# EAGLE board CT_schematic (EAGLE 7.6.0)

Size 100 x 80 mm. Coordinates in mm from the lower left corner, seen from the top.
Outline: 0,0 100,0 100,80 0,80 0,0
Copper layers (1*16): Top 0.035mm / dielectric 1.5mm / Bottom 0.035mm
Design rules "default": minimum track width 10mil, minimum drill 24mil, track to track 8mil, track to pad 8mil, pad to pad 8mil, via to via 8mil, smd to smd 8mil, copper to edge 40mil, drill to drill 8mil, minimum pad ring 10mil, minimum via ring 8mil, stop-mask expansion 4mil, vias tented up to drill 0mil, thermal gap 10mil

## Footprints (pad centres in the part's own frame; a part is rotated, then mirrored left to right if it is on the bottom)
C0603 = smd 0.8 x 0.8: 1 -0.762,0; 2 0.762,0
C0402 = smd 0.5 x 0.5: 1 -0.508,0; 2 0.508,0
C0805 = smd 1.2 x 1.3: 1 -1.016,0; 2 1.016,0
C1210 = smd 1.2 x 2.5: 1 -1.524,0; 2 1.524,0
R0603 = smd 0.8 x 0.8: 1 -0.762,0; 2 0.762,0
EXV-9H = smd 3.505 x 1.676: 1 -2.857,0; 2 2.857,0
L0603 = smd 0.8 x 0.8: 1 -0.762,0; 2 0.762,0
IND_PM3316 = smd 2.921 x 2.794: 1 -5.144,0; 2 5.144,0
IND25X25CZ = smd 2.489 x 3.429: 1 -2.718,0; 2 2.718,0
PJ-037B_PACKAGE = drill 3.7 square: 1 12,0 | drill 3.2 square: 2 6,0
UFBGA176_25 = smd 0.3 x 0.3: A1 -4.55,4.55; A2 -3.9,4.55; A3 -3.25,4.55; A4 -2.6,4.55; A5 -1.95,4.55; A6 -1.3,4.55; A7 -0.65,4.55; A8 0,4.55; A9 0.65,4.55; A10 1.3,4.55; A11 1.95,4.55; A12 2.6,4.55; A13 3.25,4.55; A14 3.9,4.55; A15 4.55,4.55; B1 -4.55,3.9; B2 -3.9,3.9; B3 -3.25,3.9; B4 -2.6,3.9; B5 -1.95,3.9; B6 -1.3,3.9; B7 -0.65,3.9; B8 0,3.9; B9 0.65,3.9; B10 1.3,3.9; B11 1.95,3.9; B12 2.6,3.9; B13 3.25,3.9; B14 3.9,3.9; B15 4.55,3.9; C1 -4.55,3.25; C2 -3.9,3.25; C3 -3.25,3.25; C4 -2.6,3.25; C5 -1.95,3.25; C6 -1.3,3.25; C7 -0.65,3.25; C8 0,3.25; C9 0.65,3.25; C10 1.3,3.25; C11 1.95,3.25; C12 2.6,3.25; C13 3.25,3.25; C14 3.9,3.25; C15 4.55,3.25; D1 -4.55,2.6; D2 -3.9,2.6; D3 -3.25,2.6; D4 -2.6,2.6; D5 -1.95,2.6; D6 -1.3,2.6; D7 -0.65,2.6; D8 0,2.6; D9 0.65,2.6; D10 1.3,2.6; D11 1.95,2.6; D12 2.6,2.6; D13 3.25,2.6; D14 3.9,2.6; D15 4.55,2.6; E1 -4.55,1.95; E2 -3.9,1.95; E3 -3.25,1.95; E4 -2.6,1.95; E12 2.6,1.95; E13 3.25,1.95; E14 3.9,1.95; E15 4.55,1.95; F1 -4.55,1.3; F2 -3.9,1.3; F3 -3.25,1.3; F4 -2.6,1.3; F6 -1.3,1.3; F7 -0.65,1.3; F8 0,1.3; F9 0.65,1.3; F10 1.3,1.3; F12 2.6,1.3; F13 3.25,1.3; F14 3.9,1.3; F15 4.55,1.3; G1 -4.55,0.65; G2 -3.9,0.65; G3 -3.25,0.65; G4 -2.6,0.65; G6 -1.3,0.65; G7 -0.65,0.65; G8 0,0.65; G9 0.65,0.65; G10 1.3,0.65; G12 2.6,0.65; G13 3.25,0.65; G14 3.9,0.65; G15 4.55,0.65; H1 -4.55,0; H2 -3.9,0; H3 -3.25,0; H4 -2.6,0; H6 -1.3,0; H7 -0.65,0; H8 0,0; H9 0.65,0; H10 1.3,0; H12 2.6,0; H13 3.25,0; H14 3.9,0; H15 4.55,0; J1 -4.55,-0.65; J2 -3.9,-0.65; J3 -3.25,-0.65; J4 -2.6,-0.65; J6 -1.3,-0.65; J7 -0.65,-0.65; J8 0,-0.65; J9 0.65,-0.65; J10 1.3,-0.65; J12 2.6,-0.65; J13 3.25,-0.65; J14 3.9,-0.65; J15 4.55,-0.65; K1 -4.55,-1.3; K2 -3.9,-1.3; K3 -3.25,-1.3; K4 -2.6,-1.3; K6 -1.3,-1.3; K7 -0.65,-1.3; K8 0,-1.3; K9 0.65,-1.3; K10 1.3,-1.3; K12 2.6,-1.3; K13 3.25,-1.3; K14 3.9,-1.3; K15 4.55,-1.3; L1 -4.55,-1.95; L2 -3.9,-1.95; L3 -3.25,-1.95; L4 -2.6,-1.95; L12 2.6,-1.95; L13 3.25,-1.95; L14 3.9,-1.95; L15 4.55,-1.95; M1 -4.55,-2.6; M2 -3.9,-2.6; M3 -3.25,-2.6; M4 -2.6,-2.6; M5 -1.95,-2.6; M6 -1.3,-2.6; M7 -0.65,-2.6; M8 0,-2.6; M9 0.65,-2.6; M10 1.3,-2.6; M11 1.95,-2.6; M12 2.6,-2.6; M13 3.25,-2.6; M14 3.9,-2.6; M15 4.55,-2.6; N1 -4.55,-3.25; N2 -3.9,-3.25; N3 -3.25,-3.25; N4 -2.6,-3.25; N5 -1.95,-3.25; N6 -1.3,-3.25; N7 -0.65,-3.25; N8 0,-3.25; N9 0.65,-3.25; N10 1.3,-3.25; N11 1.95,-3.25; N12 2.6,-3.25; N13 3.25,-3.25; N14 3.9,-3.25; N15 4.55,-3.25; P1 -4.55,-3.9; P2 -3.9,-3.9; P3 -3.25,-3.9; P4 -2.6,-3.9; P5 -1.95,-3.9; P6 -1.3,-3.9; P7 -0.65,-3.9; P8 0,-3.9; P9 0.65,-3.9; P10 1.3,-3.9; P11 1.95,-3.9; P12 2.6,-3.9; P13 3.25,-3.9; P14 3.9,-3.9; P15 4.55,-3.9; R1 -4.55,-4.55; R2 -3.9,-4.55; R3 -3.25,-4.55; R4 -2.6,-4.55; R5 -1.95,-4.55; R6 -1.3,-4.55; R7 -0.65,-4.55; R8 0,-4.55; R9 0.65,-4.55; R10 1.3,-4.55; R11 1.95,-4.55; R12 2.6,-4.55; R13 3.25,-4.55; R14 3.9,-4.55; R15 4.55,-4.55
SOT-23-6 = smd 1.1 x 0.6: 1 -1.4,0.95; 2 -1.4,0; 3 -1.4,-0.95; 4 1.4,-0.95; 5 1.4,0; 6 1.4,0.95
SSOP-28 = smd 1.5 x 0.4: 1 -3.625,4.225; 2 -3.625,3.575; 3 -3.625,2.925; 4 -3.625,2.275; 5 -3.625,1.625; 6 -3.625,0.975; 7 -3.625,0.325; 8 -3.625,-0.325; 9 -3.625,-0.975; 10 -3.625,-1.625; 11 -3.625,-2.275; 12 -3.625,-2.925; 13 -3.625,-3.575; 14 -3.625,-4.225; 15 3.625,-4.225; 16 3.625,-3.575; 17 3.625,-2.925; 18 3.625,-2.275; 19 3.625,-1.625; 20 3.625,-0.975; 21 3.625,-0.325; 22 3.625,0.325; 23 3.625,0.975; 24 3.625,1.625; 25 3.625,2.275; 26 3.625,2.925; 27 3.625,3.575; 28 3.625,4.225
FCI_10118193-0001LF = smd 0.4 x 1.35: 1 -1.3,2.675; 2 -0.65,2.675; 3 0,2.675; 4 0.65,2.675; 5 1.3,2.675 | smd 1.6 x 1.4: 6 -3.2,2.45; 7 3.2,2.45 | smd 1.9 x 1.9: 8 -1.2,0; 9 1.2,0 | hole 0.5: -3.3,0; 3.3,0
S29VS256RABBHW000 = smd 0.3 x 0.3: A1 -6,3; A14 0.5,3; C3 -5,2; C4 -4.5,2; C5 -4,2; C6 -3.5,2; C7 -3,2; C8 -2.5,2; C9 -2,2; C10 -1.5,2; C11 -1,2; C12 -0.5,2; D3 -5,1.5; D4 -4.5,1.5; D5 -4,1.5; D6 -3.5,1.5; D7 -3,1.5; D8 -2.5,1.5; D9 -2,1.5; D10 -1.5,1.5; D11 -1,1.5; D12 -0.5,1.5; E3 -5,1; E4 -4.5,1; E5 -4,1; E6 -3.5,1; E7 -3,1; E8 -2.5,1; E9 -2,1; E10 -1.5,1; E11 -1,1; E12 -0.5,1; F3 -5,0.5; F4 -4.5,0.5; F5 -4,0.5; F6 -3.5,0.5; F7 -3,0.5; F8 -2.5,0.5; F9 -2,0.5; F10 -1.5,0.5; F11 -1,0.5; F12 -0.5,0.5; H1 -6,-0.5; H14 0.5,-0.5
HTSS-105-01-G-D = drill 1 pad 1.8 square: 1 0,0 | drill 1 pad 1.8: 2 0,2.54; 3 2.54,0; 4 2.54,2.54; 5 5.08,0; 6 5.08,2.54; 7 7.62,0; 8 7.62,2.54; 9 10.16,0; 10 10.16,2.54
MICRO_USB_AB = smd 0.4 x 1.35: 1 1.3,0.26; 2 0.65,0.26; 3 0,0.26; 4 -0.65,0.26; 5 -1.3,0.26 | drill 0.6 pad 0.95 long: 6 4.175,-2.54; 7 -4.175,-2.54 | drill 0.7 pad 1.1 long: 8 -2.225,0.46; 9 2.225,0.46
SOT143B = smd 1 x 0.7: 1 -0.75,-1 | smd 0.6 x 0.7: 2 0.95,-1; 3 0.95,1; 4 -0.95,1
ABS07-32.768KHZ-7-T = smd 1.1 x 2.4: 1 -2.5,0; 2 0,0
ABLS-25.000MHZ-B2F-T = smd 5.6 x 2.8: 1 -3.81,0; 2 5.69,0
ASFL1 = smd 1.7 x 1.5: 1 -1.27,-1.1; 2 1.27,-1.1; 3 1.27,1.1; 4 -1.27,1.1
HTSSOP14 = smd 1.676 x 0.356: 1 -2.8,1.95; 2 -2.8,1.3; 3 -2.8,0.65; 4 -2.8,0; 5 -2.8,-0.65; 6 -2.8,-1.3; 7 -2.8,-1.95; 8 2.8,-1.95; 9 2.8,-1.3; 10 2.8,-0.65; 11 2.8,0; 12 2.8,0.65; 13 2.8,1.3; 14 2.8,1.95 | smd 3 x 5: 15 0,0 | drill 0.4 pad 0.45: P$1 -0.75,1.5; P$2 0.75,1.5; P$3 -0.75,0; P$4 0.8,0; P$5 -0.75,-1.5; P$6 0.9,-1.5
IR3899MTR1PBF = smd 0.25 x 0.75: 1 0,0; 2 0.5,0; 3 1,0; 4 1.5,0; 5 2,0; 6 2.5,0; 7 3,0 | smd 0.75 x 0.25: 8 3.425,0.78; 9 3.425,1.28; 10 3.425,1.78; 14 -0.425,1.78; 15 -0.425,1.28; 16 -0.425,0.78 | smd 0.3 x 1.95: 11 3.22,3.63 | smd 1.62 x 2.42: 12 1.786,3.8 | smd 1 x 1.95: 13 0.117,3.63 | smd 2.19 x 1.25: 17 1.51,1.26
SON-6 = smd 0.55 x 0.3: 1 -0.355,0.5 | smd 0.52 x 0.3: 2 -0.37,0; 3 -0.37,-0.5; 4 0.37,-0.5; 5 0.37,0; 6 0.37,0.5
DCU0008A_N = smd 0.5 x 0.3: 1 -1.6,0.75; 2 -1.6,0.25; 3 -1.6,-0.25; 4 -1.6,-0.75; 5 1.6,-0.75; 6 1.6,-0.25; 7 1.6,0.25; 8 1.6,0.75
SW_4-1437565-2 = smd 1.4 x 2.1: 1 -2.23,4.55; 2 -2.23,-4.55; 3 2.23,4.55; 4 2.23,-4.55
LGM67K-G1J2-24-Z = smd 0.8 x 1.4: A -2,0; C 0,0
NC7SZ125M5X = smd 1.3 x 0.7: 1 -1.3,0.95; 2 -1.3,0; 3 -1.3,-0.95; 4 1.3,-0.95; 5 1.3,0.95

## Placement (x,y rotation side)
C1  1e-06  [C0603]  -71.12,72.39 0 top  (outside the outline)
C2  1e-07  [C0603]  -74.93,72.39 0 top  (outside the outline)
C3  1e-07  [C0603]  -78.74,72.39 0 top  (outside the outline)
C4  1e-07  [C0603]  -82.55,72.39 0 top  (outside the outline)
C5  1e-07  [C0603]  -86.36,72.39 0 top  (outside the outline)
C6  1e-07  [C0603]  -15.24,77.47 0 top  (outside the outline)
C7  1e-07  [C0603]  -19.05,77.47 0 top  (outside the outline)
C8  1e-07  [C0603]  -22.86,77.47 0 top  (outside the outline)
C9  1e-07  [C0603]  -26.67,77.47 0 top  (outside the outline)
C10  1e-07  [C0603]  -30.48,77.47 0 top  (outside the outline)
C11  1e-07  [C0603]  -34.29,77.47 0 top  (outside the outline)
C12  1e-07  [C0603]  -38.1,77.47 0 top  (outside the outline)
C13  1e-07  [C0603]  -41.91,77.47 0 top  (outside the outline)
C14  1e-07  [C0603]  -45.72,77.47 0 top  (outside the outline)
C15  1e-07  [C0603]  -49.53,77.47 0 top  (outside the outline)
C16  1e-07  [C0603]  -53.34,77.47 0 top  (outside the outline)
C17  4.7e-06  [C0603]  -44.45,72.39 0 top  (outside the outline)
C18  1e-08  [C0603]  -57.15,77.47 0 top  (outside the outline)
C19  1e-06  [C0603]  -60.96,77.47 0 top  (outside the outline)
C20  2.2e-06  [C0603]  -48.26,72.39 0 top  (outside the outline)
C21  2.2e-06  [C0603]  -52.07,72.39 0 top  (outside the outline)
C22  1e-11  [C0402]  -39.37,82.55 0 top  (outside the outline)
C23  1e-11  [C0402]  -43.18,82.55 0 top  (outside the outline)
C24  1e-11  [C0402]  -46.99,82.55 0 top  (outside the outline)
C25  1e-11  [C0402]  -50.8,82.55 0 top  (outside the outline)
C26  1e-07  [C0402]  -54.61,82.55 0 top  (outside the outline)
C27  4.7e-06  [C0805]  -39.37,55.88 0 top  (outside the outline)
C28  1e-07  [C0402]  -58.42,82.55 0 top  (outside the outline)
C29  1e-07  [C0402]  -62.23,82.55 0 top  (outside the outline)
C30  1e-07  [C0402]  -66.04,82.55 0 top  (outside the outline)
C31  2.2e-06  [C0603]  -55.88,72.39 0 top  (outside the outline)
C32  1e-07  [C0402]  -69.85,82.55 0 top  (outside the outline)
C33  2.2e-06  [C0603]  -59.69,72.39 0 top  (outside the outline)
C34  1e-07  [C0402]  -73.66,82.55 0 top  (outside the outline)
C35  1e-07  [C0402]  -77.47,82.55 0 top  (outside the outline)
C36  1e-07  [C0402]  -81.28,82.55 0 top  (outside the outline)
C37  1e-07  [C0402]  -85.09,82.55 0 top  (outside the outline)
C38  1e-07  [C0402]  -15.24,87.63 0 top  (outside the outline)
C39  1e-08  [C0402]  -19.05,87.63 0 top  (outside the outline)
C40  1e-06  [C0603]  -64.77,77.47 0 top  (outside the outline)
C41  3.3e-09  [C0402]  -35.56,82.55 0 top  (outside the outline)
C42  1e-07  [C0402]  -22.86,87.63 0 top  (outside the outline)
C43  2.2e-05  [C1210]  -57.15,49.53 0 top  (outside the outline)
C44  2.2e-05  [C1210]  -63.5,49.53 0 top  (outside the outline)
C45  1e-05  [C1210]  -69.85,49.53 0 top  (outside the outline)
C46  1e-05  [C1210]  -76.2,49.53 0 top  (outside the outline)
C47  0.0001  [C1210]  -82.55,49.53 0 top  (outside the outline)
C48  2.2e-06  [C0603]  -63.5,72.39 0 top  (outside the outline)
C49  1e-07  [C0402]  -26.67,87.63 0 top  (outside the outline)
C50  1e-07  [C0402]  -30.48,87.63 0 top  (outside the outline)
C51  8.6971073877236e-09  [R0603]  -49.53,55.88 0 top  (outside the outline)
C52  2.9649229730876e-07  [R0603]  -59.69,55.88 0 top  (outside the outline)
C55  0.0001  [C1210]  -16.51,57.15 0 top  (outside the outline)
C56  2.2e-06  [C0603]  -67.31,72.39 0 top  (outside the outline)
C57  1e-07  [C0402]  -34.29,87.63 0 top  (outside the outline)
C58  1e-07  [C0402]  -38.1,87.63 0 top  (outside the outline)
C59  8.6971073877236e-09  [R0603]  -69.85,55.88 0 top  (outside the outline)
C60  2.9649229730876e-07  [R0603]  -80.01,55.88 0 top  (outside the outline)
C63  1e-07  [C0402]  -41.91,87.63 0 top  (outside the outline)
C64  0.0001  [EXV-9H]  -17.78,41.91 0 top  (outside the outline)
C65  0.0001  [EXV-9H]  -29.21,41.91 0 top  (outside the outline)
C66  1e-08  [C0402]  -45.72,87.63 0 top  (outside the outline)
C67  1e-07  [C0402]  -49.53,87.63 0 top  (outside the outline)
C68  1e-08  [C0402]  -53.34,87.63 0 top  (outside the outline)
C69  1e-07  [C0402]  -57.15,87.63 0 top  (outside the outline)
C70  1e-08  [C0402]  -60.96,87.63 0 top  (outside the outline)
C71  1e-08  [C0402]  -64.77,87.63 0 top  (outside the outline)
F1  240.0  [L0603]  -68.58,77.47 0 top  (outside the outline)
I1  1e-05  [IND_PM3316]  -69.85,20.32 0 top  (outside the outline)
I2  6.8e-07  [IND25X25CZ]  -59.69,41.91 0 top  (outside the outline)
I3  6.8e-07  [IND25X25CZ]  -68.58,41.91 0 top  (outside the outline)
J1  PJ-037B  [PJ-037B_PACKAGE]  -66.04,7.62 0 top  (outside the outline)
R2  1000.0  [R0603]  -72.39,77.47 0 top  (outside the outline)
R7  4700.0  [R0603]  -76.2,77.47 0 top  (outside the outline)
R8  4700.0  [R0603]  -80.01,77.47 0 top  (outside the outline)
R9  47000.0  [R0603]  -15.24,67.31 0 top  (outside the outline)
R10  10000.0  [R0603]  -20.32,67.31 0 top  (outside the outline)
R11  10000.0  [R0603]  -25.4,67.31 0 top  (outside the outline)
R12  10000.0  [R0603]  -30.48,67.31 0 top  (outside the outline)
R13  10000.0  [R0603]  -35.56,67.31 0 top  (outside the outline)
R14  10000.0  [R0603]  -40.64,67.31 0 top  (outside the outline)
R15  4700.0  [R0603]  -83.82,77.47 0 top  (outside the outline)
R16  10000.0  [R0603]  -45.72,67.31 0 top  (outside the outline)
R17  10000.0  [R0603]  -50.8,67.31 0 top  (outside the outline)
R18  10000.0  [R0603]  -55.88,67.31 0 top  (outside the outline)
R19  10000.0  [R0603]  -60.96,67.31 0 top  (outside the outline)
R20  10000.0  [R0603]  -66.04,67.31 0 top  (outside the outline)
R21  10000.0  [R0603]  -71.12,67.31 0 top  (outside the outline)
R22  100000.0  [R0603]  -69.85,62.23 0 top  (outside the outline)
R23  30000.0  [R0603]  -76.2,67.31 0 top  (outside the outline)
R24  22000.0  [R0603]  -81.28,67.31 0 top  (outside the outline)
R25  0.1  [R0603]  -15.24,82.55 0 top  (outside the outline)
R26  4030.2416170974  [R0603]  -19.05,62.23 0 top  (outside the outline)
R27  719.68600305311  [R0603]  -26.67,62.23 0 top  (outside the outline)
R28  58.613333333333  [R0603]  -34.29,62.23 0 top  (outside the outline)
R29  130.0  [R0603]  -19.05,82.55 0 top  (outside the outline)
R30  39000.0  [R0603]  -86.36,67.31 0 top  (outside the outline)
R31  49900.0  [R0603]  -15.24,72.39 0 top  (outside the outline)
R32  5147.5789473684  [R0603]  -41.91,62.23 0 top  (outside the outline)
R33  0.1  [R0603]  -22.86,82.55 0 top  (outside the outline)
R34  4030.2416170974  [R0603]  -49.53,62.23 0 top  (outside the outline)
R35  453.0  [R0603]  -26.67,82.55 0 top  (outside the outline)
R36  58.613333333333  [R0603]  -57.15,62.23 0 top  (outside the outline)
R37  130.0  [R0603]  -30.48,82.55 0 top  (outside the outline)
R38  39000.0  [R0603]  -20.32,72.39 0 top  (outside the outline)
R39  49900.0  [R0603]  -25.4,72.39 0 top  (outside the outline)
R40  5147.5789473684  [R0603]  -64.77,62.23 0 top  (outside the outline)
R41  10000.0  [R0603]  -30.48,72.39 0 top  (outside the outline)
R42  10000.0  [R0603]  -35.56,72.39 0 top  (outside the outline)
R43  82000.0  [R0603]  -40.64,72.39 0 top  (outside the outline)
R44  300000.0  [R0603]  -74.93,62.23 0 top  (outside the outline)
R45  120000.0  [R0603]  -80.01,62.23 0 top  (outside the outline)
R46  200000.0  [R0603]  -85.09,62.23 0 top  (outside the outline)
U1  STM32F417IGH6  [UFBGA176_25]  -43.18,6.35 0 top  (outside the outline)
U2  MAX4995AAUT+T  [SOT-23-6]  -21.59,55.88 0 top  (outside the outline)
U3  FT232RL-REEL  [SSOP-28]  -20.32,7.62 0 top  (outside the outline)
U4  10118193-0001LF  [FCI_10118193-0001LF]  -53.34,31.75 0 top  (outside the outline)
U5  S29VS256RABBHW000  [S29VS256RABBHW000]  -71.12,30.48 0 top  (outside the outline)
U6  ST3241EBPR  [SSOP-28]  -31.75,7.62 0 top  (outside the outline)
U7  HTSS-105-01-G-D  [HTSS-105-01-G-D]  -27.94,31.75 0 top  (outside the outline)
U8  47590-0001  [MICRO_USB_AB]  -74.93,7.62 0 top  (outside the outline)
U9  prtr5v0u2ax  [SOT143B]  -77.47,87.63 0 top  (outside the outline)
U10  ABS07-32.768KHZ-7-T  [ABS07-32.768KHZ-7-T]  -27.94,49.53 0 top  (outside the outline)
U11  ABLS-25.000MHZ-B2F-T  [ABLS-25.000MHZ-B2F-T]  -48.26,41.91 0 top  (outside the outline)
U12  ASFL1-12MHZ-NCS  [ASFL1]  -44.45,31.75 0 top  (outside the outline)
U13  tps54225PWP  [HTSSOP14]  -36.83,49.53 0 top  (outside the outline)
U14  IR3899MTR1PBF  [IR3899MTR1PBF]  -44.45,17.78 0 top  (outside the outline)
U15  IR3899MTR1PBF  [IR3899MTR1PBF]  -59.69,17.78 0 top  (outside the outline)
U16  TPS3895ADRYR  [SON-6]  -29.21,91.44 0 top  (outside the outline)
U17  LSF0102DCTR  [DCU0008A_N]  -24.13,91.44 0 top  (outside the outline)
U18  4-1437565-2  [SW_4-1437565-2]  -27.94,21.59 0 top  (outside the outline)
U19  Q65110A2395  [LGM67K-G1J2-24-Z]  -45.72,49.53 0 top  (outside the outline)
U20  nc7sz125m5x  [NC7SZ125M5X]  -26.67,55.88 0 top  (outside the outline)
U21  nc7sz125m5x  [NC7SZ125M5X]  -33.02,55.88 0 top  (outside the outline)

## Library data of the parts
C1-C52 C55-C60 C63-C71 F1 I1-I3 J1 R2 R7-R46 U1-U21 = circuit_tree

## Nets
CLK_CRYSTAL_U1_E1: C22.1 U1.E1 U10.1
CLK_CRYSTAL_U1_F1: C23.1 U1.F1 U10.2
CLK_CRYSTAL_U1_G1: C24.1 U1.G1 U11.1
CLK_CRYSTAL_U1_H1: C25.1 U1.H1 U11.2
CLK_U3_27: U3.27 U12.3
GND: C1.2 C2.2 C3.2 C4.2 C5.2 C6.2 C7.2 C8.2 C9.2 C10.2 C11.2 C12.2 C13.2 C14.2 C15.2 C16.2 C17.2 C18.2 C19.2 C20.2 C21.2 C22.2 C23.2 C24.2 C25.2 C26.2 C27.2 C28.2 C29.2 C30.2 C31.2 C32.2 C33.2 C34.2 C37.2 C38.2 C39.2 C40.2 C41.2 C43.2 C44.2 C45.2 C46.2 C48.2 C49.2 C50.2 C56.2 C57.2 C58.2 C63.2 C64.2 C65.2 C66.2 C67.2 C68.2 C69.2 C70.2 C71.2 J1.2 R2.2 R9.2 R11.2 R12.2 R14.2 R17.2 R24.2 R25.1 R25.2 R27.2 R30.2 R32.2 R33.1 R33.2 R35.2 R38.2 R40.2 R43.2 R45.2 U1.D5 U1.D7 U1.D8 U1.D9 U1.F2 U1.F6 U1.F7 U1.F8 U1.F9 U1.F10 U1.F12 U1.G2 U1.G6 U1.G7 U1.G8 U1.G9 U1.G10 U1.G12 U1.H6 U1.H7 U1.H8 U1.H9 U1.H10 U1.H12 U1.J6 U1.J7 U1.J8 U1.J9 U1.J10 U1.K6 U1.K7 U1.K8 U1.K9 U1.K10 U1.M1 U1.M8 U1.M9 U1.N1 U2.2 U3.7 U3.18 U3.21 U3.25 U3.26 U4.5 U4.6 U4.7 U4.8 U4.9 U5.C5 U5.D12 U5.E3 U5.F5 U6.23 U6.25 U7.9 U8.5 U8.6 U8.7 U8.8 U8.9 U9.1 U12.2 U13.5 U13.8 U13.9 U13.15 U14.4 U14.11 U14.17 U15.4 U15.11 U15.17 U16.2 U17.1 U19.C U20.1 U20.3 U21.1 U21.3
NET_U1_C6: R10.1 U1.C6
NET_U1_D6: R11.1 U1.D6
NET_U1_F13: C21.1 U1.F13
NET_U1_J1: R8.1 U1.J1 U21.4
NET_U1_L4: R12.1 U1.L4
NET_U1_M10: C20.1 U1.M10
NET_U1_R1: C18.1 C19.1 F1.1 U1.P1 U1.R1
NET_U1_R14: U19.A
NET_U1_R15: U18.3 U18.4
NET_U2_3: R9.1 U2.3
NET_U3_14: R16.1 U3.14
NET_U3_17: C28.1 U3.17
NET_U3_19: R17.1 U3.19
NET_U4_1: R15.1 U4.1
NET_U4_2: U3.16 U4.2
NET_U4_3: U3.15 U4.3
NET_U4_19: R15.2
NET_U5_C9: U5.C9
NET_U5_D8: R7.1 U5.D8 U20.4
NET_U6_1: C36.1 U6.1
NET_U6_2: C36.2 U6.2
NET_U6_3: C38.1 U6.3
NET_U6_22: R22.1 U6.22
NET_U6_24: C35.2 U6.24
NET_U6_27: C37.1 U6.27
NET_U6_28: C35.1 U6.28
NET_U7_3: U6.4 U7.3
NET_U7_4: U6.5 U7.4
NET_U7_5: U6.9 U7.5
NET_U7_6: U6.10 U7.6
NET_U13_2: R23.2 R24.1 U13.2
NET_U13_3: C40.1 U13.3
NET_U13_4: C41.1 U13.4
NET_U13_10: C42.1 I1.1 U13.10 U13.11
NET_U13_12: C42.2 U13.12
NET_U14_1: C51.1 R26.1 R27.1 R28.1 R29.1 U14.1 U14.8
NET_U14_2: C50.1 U14.2
NET_U14_3: C51.2 C52.1 C52.2 U14.3
NET_U14_5: R30.1 U14.5
NET_U14_10: C48.1 U14.10
NET_U14_12: C47.1 I2.1 U14.12
NET_U14_13: U14.13
NET_U14_14: C47.2 U14.14
NET_U14_15: R31.1 R32.1 U14.15
NET_U14_ATNET_3: I2.2 R26.2
NET_U14_ATNET_4: C52.2 R28.2
NET_U14_ATNET_5: R29.2
NET_U15_1: C59.1 R34.1 R35.1 R36.1 R37.1 U15.1 U15.8
NET_U15_2: C58.1 U15.2
NET_U15_3: C59.2 C60.1 C60.2 U15.3
NET_U15_5: R38.1 U15.5
NET_U15_10: C56.1 U15.10
NET_U15_12: C55.1 I3.1 U15.12
NET_U15_13: U15.13
NET_U15_14: C55.2 U15.14
NET_U15_15: R39.1 R40.1 U15.15
NET_U15_ATNET_3: I3.2 R34.2
NET_U15_ATNET_4: C60.2 R36.2
NET_U15_ATNET_5: R37.2
NET_U16_1: R42.1 R43.1 U16.1
NET_U16_3: R44.2 R45.1 U16.3
NET_U16_4: R41.1 U16.4 U20.2 U21.2
NET_U17_8: R46.1 U17.8
NET_U18_1: R2.1 U18.1 U18.2
PROC_FSMC_A16: U1.N14 U5.D4
PROC_FSMC_A17: U1.N13 U5.C11
PROC_FSMC_A18: U1.M15 U5.D10
PROC_FSMC_A19: U1.A1 U5.C10
PROC_FSMC_A20: U1.B1 U5.D5
PROC_FSMC_A21: U1.B2 U5.C4
PROC_FSMC_A22: U1.B3 U5.C12
PROC_FSMC_A23: U1.A2 U5.D7
PROC_FSMC_CLK: U1.D11 U5.C6
PROC_FSMC_D0: U1.M14 U5.F3
PROC_FSMC_D1: U1.L14 U5.F4
PROC_FSMC_D2: U1.B12 U5.E6
PROC_FSMC_D3: U1.C12 U5.E7
PROC_FSMC_D4: U1.R8 U5.F8
PROC_FSMC_D5: U1.P8 U5.F9
PROC_FSMC_D6: U1.P9 U5.E10
PROC_FSMC_D7: U1.R9 U5.E11
PROC_FSMC_D8: U1.P10 U5.E4
PROC_FSMC_D9: U1.R10 U5.E5
PROC_FSMC_D10: U1.N11 U5.F6
PROC_FSMC_D11: U1.P11 U5.F7
PROC_FSMC_D12: U1.R11 U5.E8
PROC_FSMC_D13: U1.P15 U5.E9
PROC_FSMC_D14: U1.P14 U5.F11
PROC_FSMC_D15: U1.N15 U5.F12
PROC_FSMC_NE4: R19.1 U1.B8 U5.D11
PROC_FSMC_NL: U1.B5 U5.D6
PROC_FSMC_NOE: R21.1 U1.D10 U5.E12
PROC_FSMC_NWAIT: R18.1 U1.B11 U5.C3
PROC_FSMC_NWE: R20.1 U1.C11 U5.C8
PROC_GPIO_TO_U1_USB_FAULT: R13.1 U1.A4 U2.6
PROC_GPIO_TO_U1_VBUS_EN: R14.1 U1.A3 U2.4
PROC_UART4_RX_TOIOBUF: U17.3
PROC_UART4_RX_TOXCVR: U6.19 U17.6
PROC_UART4_TX_TOIOBUF: U17.4
PROC_UART4_TX_TOXCVR: U6.14 U17.5
PROC_UART5_RX: U1.D12 U3.1
PROC_UART5_TX: U1.A12 U3.5
PROC_USB_OTG_FS_DM: U1.C15 U8.2 U9.3
PROC_USB_OTG_FS_DP: U1.B15 U8.3 U9.2
PROC_USB_OTG_FS_ID: U1.D15 U8.4
PROC_USB_OTG_FS_VBUS: U1.E15 U2.1 U8.1 U9.4
VCC_S1_16V8: C45.1 C46.1 C49.1 C57.1 C64.1 C65.1 J1.1 R31.2 R39.2 U13.7 U13.13 U13.14 U14.9 U15.9
VCC_TIER1_1V8: C1.1 C2.1 C3.1 C4.1 C5.1 C6.1 C7.1 C8.1 C9.1 C10.1 C11.1 C12.1 C13.1 C14.1 C15.1 C16.1 C17.1 C29.1 C30.1 C31.1 C32.1 C33.1 C43.1 C44.1 C63.1 C68.1 C69.1 C70.1 C71.1 F1.2 I1.2 R7.2 R8.2 R10.2 R13.2 R18.2 R19.2 R20.2 R21.2 R23.1 R41.2 R42.2 R44.1 U1.C1 U1.C5 U1.C7 U1.C8 U1.C9 U1.F3 U1.G3 U1.G13 U1.H13 U1.J12 U1.J13 U1.K4 U1.N8 U1.N9 U1.N10 U3.4 U5.C7 U5.D3 U5.F10 U13.1 U16.6 U17.2 U20.5 U21.5
VCC_TIER1_3V3: C26.1 C27.1 C34.1 C39.1 C66.1 C67.1 I2.2 R16.2 R22.2 R26.2 R46.2 U3.20 U6.26 U12.4 U17.7
VCC_TIER1_5V0: I3.2 R34.2 U2.5

## Tracks (layer width: path | path; a pad name or v marks a point on that pad's centre or on a via)
CLK_CRYSTAL_U1_E1  (2 unrouted)
CLK_CRYSTAL_U1_F1  (2 unrouted)
CLK_CRYSTAL_U1_G1  (2 unrouted)
CLK_CRYSTAL_U1_H1  (2 unrouted)
CLK_U3_27  (1 unrouted)
GND  (157 unrouted)
NET_U1_C6  (1 unrouted)
NET_U1_D6  (1 unrouted)
NET_U1_F13  (1 unrouted)
NET_U1_J1  (2 unrouted)
NET_U1_L4  (1 unrouted)
NET_U1_M10  (1 unrouted)
NET_U1_R1  (4 unrouted)
NET_U1_R15  (1 unrouted)
NET_U2_3  (1 unrouted)
NET_U3_14  (1 unrouted)
NET_U3_17  (1 unrouted)
NET_U3_19  (1 unrouted)
NET_U4_1  (1 unrouted)
NET_U4_2  (1 unrouted)
NET_U4_3  (1 unrouted)
NET_U5_D8  (2 unrouted)
NET_U6_1  (1 unrouted)
NET_U6_2  (1 unrouted)
NET_U6_3  (1 unrouted)
NET_U6_22  (1 unrouted)
NET_U6_24  (1 unrouted)
NET_U6_27  (1 unrouted)
NET_U6_28  (1 unrouted)
NET_U7_3  (1 unrouted)
NET_U7_4  (1 unrouted)
NET_U7_5  (1 unrouted)
NET_U7_6  (1 unrouted)
NET_U13_2  (2 unrouted)
NET_U13_3  (1 unrouted)
NET_U13_4  (1 unrouted)
NET_U13_10  (3 unrouted)
NET_U13_12  (1 unrouted)
NET_U14_1  (6 unrouted)
NET_U14_2  (1 unrouted)
NET_U14_3  (3 unrouted)
NET_U14_5  (1 unrouted)
NET_U14_10  (1 unrouted)
NET_U14_12  (2 unrouted)
NET_U14_14  (1 unrouted)
NET_U14_15  (2 unrouted)
NET_U14_ATNET_3  (1 unrouted)
NET_U14_ATNET_4  (1 unrouted)
NET_U15_1  (6 unrouted)
NET_U15_2  (1 unrouted)
NET_U15_3  (3 unrouted)
NET_U15_5  (1 unrouted)
NET_U15_10  (1 unrouted)
NET_U15_12  (2 unrouted)
NET_U15_14  (1 unrouted)
NET_U15_15  (2 unrouted)
NET_U15_ATNET_3  (1 unrouted)
NET_U15_ATNET_4  (1 unrouted)
NET_U16_1  (2 unrouted)
NET_U16_3  (2 unrouted)
NET_U16_4  (3 unrouted)
NET_U17_8  (1 unrouted)
NET_U18_1  (2 unrouted)
PROC_FSMC_A16  (1 unrouted)
PROC_FSMC_A17  (1 unrouted)
PROC_FSMC_A18  (1 unrouted)
PROC_FSMC_A19  (1 unrouted)
PROC_FSMC_A20  (1 unrouted)
PROC_FSMC_A21  (1 unrouted)
PROC_FSMC_A22  (1 unrouted)
PROC_FSMC_A23  (1 unrouted)
PROC_FSMC_CLK  (1 unrouted)
PROC_FSMC_D0  (1 unrouted)
PROC_FSMC_D1  (1 unrouted)
PROC_FSMC_D2  (1 unrouted)
PROC_FSMC_D3  (1 unrouted)
PROC_FSMC_D4  (1 unrouted)
PROC_FSMC_D5  (1 unrouted)
PROC_FSMC_D6  (1 unrouted)
PROC_FSMC_D7  (1 unrouted)
PROC_FSMC_D8  (1 unrouted)
PROC_FSMC_D9  (1 unrouted)
PROC_FSMC_D10  (1 unrouted)
PROC_FSMC_D11  (1 unrouted)
PROC_FSMC_D12  (1 unrouted)
PROC_FSMC_D13  (1 unrouted)
PROC_FSMC_D14  (1 unrouted)
PROC_FSMC_D15  (1 unrouted)
PROC_FSMC_NE4  (2 unrouted)
PROC_FSMC_NL  (1 unrouted)
PROC_FSMC_NOE  (2 unrouted)
PROC_FSMC_NWAIT  (2 unrouted)
PROC_FSMC_NWE  (2 unrouted)
PROC_GPIO_TO_U1_USB_FAULT  (2 unrouted)
PROC_GPIO_TO_U1_VBUS_EN  (2 unrouted)
PROC_UART4_RX_TOXCVR  (1 unrouted)
PROC_UART4_TX_TOXCVR  (1 unrouted)
PROC_UART5_RX  (1 unrouted)
PROC_UART5_TX  (1 unrouted)
PROC_USB_OTG_FS_DM  (2 unrouted)
PROC_USB_OTG_FS_DP  (2 unrouted)
PROC_USB_OTG_FS_ID  (1 unrouted)
PROC_USB_OTG_FS_VBUS  (3 unrouted)
VCC_S1_16V8  (13 unrouted)
VCC_TIER1_1V8  (66 unrouted)
VCC_TIER1_3V3  (14 unrouted)
VCC_TIER1_5V0  (2 unrouted)